# Altium PCB DAP Board V0.3.PcbDoc
Units mil, origin at the board's own origin, x right, y up, seen from the top; angles counter-clockwise.
Board outline 770 x 680 mil, 2 copper layers (Top Layer, Bottom Layer); 6 components, 14 nets, 62 pads, 78 vias.
Unrouted connection lines stored in the file: 8.
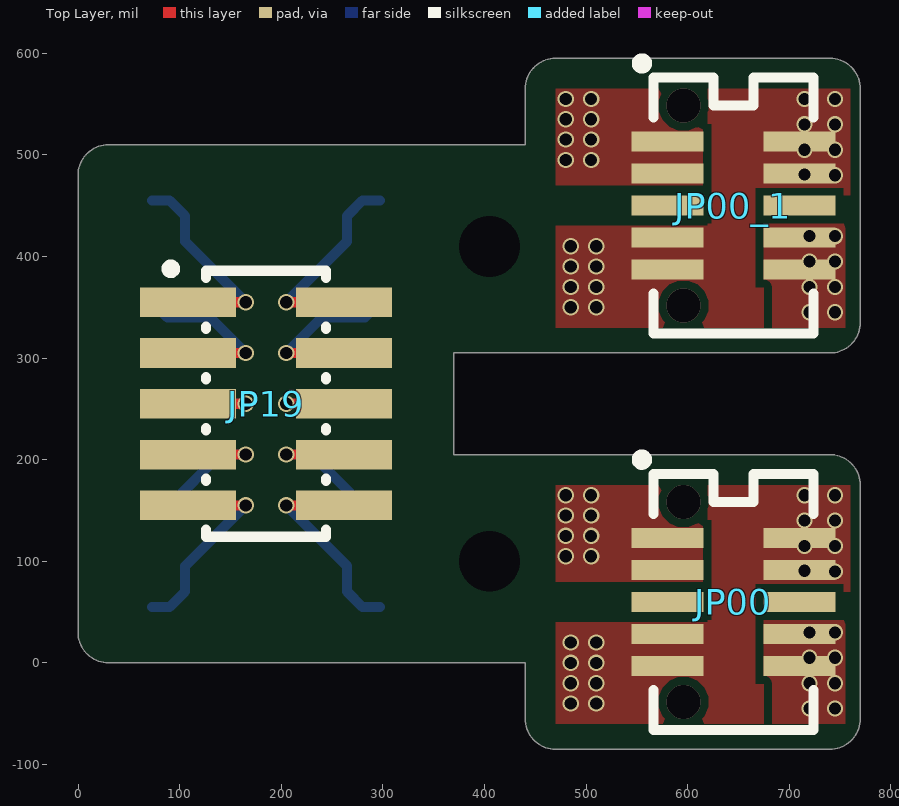
[diagram p0: Top Layer view]
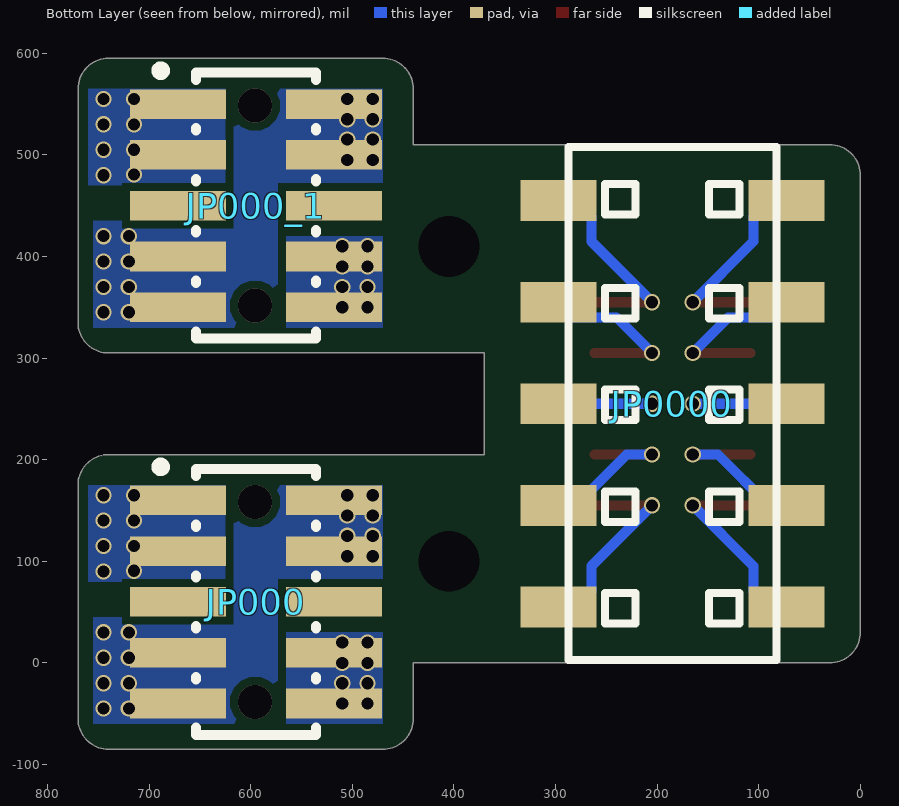
[diagram p1: Bottom Layer view, seen from below]

## Layer stack, top to bottom
Top Solder: solder mask 0.4, Solder Resist, Dk 3.5
Top Layer: signal copper 1.4
Dielectric 1: dielectric 12.6, FR-4, Dk 4.8
Bottom Layer: signal copper 1.4
Bottom Solder: solder mask 0.4, Solder Resist, Dk 3.5

## Board outline
30,0 cw(c30,30) 0,30 0,480 cw(c30,480) 30,510 440,510 440,565 cw(c470,565) 470,595 740,595 cw(c740,565) 770,565 770,335 cw(c740,335) 740,305 370,305 370,205 740,205 cw(c740,175) 770,175 770,-55 cw(c740,-55) 740,-85 470,-85 cw(c470,-55) 440,-55 440,0

## Design rules (kind name [scope] priority, off if disabled: settings)
Clearance [All] p1: gap=8 ignorepadtopadclearanceinfootprint=FALSE except(0: Arc-Hole Track-Hole SMDPad-Hole THPad-Hole Via-Hole Fill-Hole Poly-Hole Region-Hole Text-Hole)
PolygonConnect [All] p1: connectstyle=Relief reliefconductorwidth=10 reliefentries=4 polygonreliefangle="90 Angle" airgapwidth=10
RoutingVias [All] p1: holewidth=28 width=50 viastyle="Through Hole" minholewidth=28 minwidth=50 maxholewidth=28 maxwidth=50
SolderMaskExpansion [All] p1: expansion=4 istentingtop=FALSE
Width [All] p1: maxlimit=8 minlimit=8 preferedwidth=8
30 further rules are at their usual default settings.

## Components (designator, comment, footprint, x,y, rotation, side; value= is the part's Value field where it differs from the comment)
JP00 "Header 5*2" BTB-0.8MM-SMD-BM-2*5PIN 645,60 r0 top
JP000 "Header 5X2" HDR1.27-M-LS-2x5P#1 595,60 r270 bottom
JP0000 "Header 5X2" HDR2.54-M-LS-2x5P 185,255 r270 bottom
JP000_1 "Header 5X2" HDR1.27-M-LS-2x5P#1 595,450 r270 bottom locked (schematic designator JP000)
JP00_1 "Header 5*2" BTB-0.8MM-SMD-BM-2*5PIN 645,450 r0 top (schematic designator JP00)
JP19 "Header 5X2" HDR1.27-M-LS-2x5P#2 185,255 r270 top

## Footprints (in the part's own frame and the unit in brackets; to place one, negate y for a bottom-side part, rotate by r counter-clockwise, add the part's x,y. Pads: shape width x height; smd on the part's side, far side on the other; paste and mask are expansions set on the pad)
BTB-0.8MM-SMD-BM-2*5PIN [mm] "0.8侧插板对板公座，10PIN"
  rect 1.8x0.5 smd: 1(-1.65,1.6) 2(1.65,1.6) 3(-1.65,0.8) 4(1.65,0.8) 5(-1.65,0) 6(1.65,0) 7(-1.65,-0.8) 8(1.65,-0.8) 9(-1.65,-1.6) 10(1.65,-1.6)
  silkscreen extent -2.41,-3.2 2,3.68, body extent -2.16,-2.88 2.05,2.88, height 3.61
HDR1.27-M-LS-2x5P#1 [mm] "脚距：1.27mm，贴片双排母"
  rect 0.74x2.4 smd: 1(-2.54,-1.95) 3(-1.27,-1.95) 5(0,-1.95) 6(0,1.95) 7(1.27,-1.95) 9(2.54,-1.95)
  rect 0.74x2.4 smd mask+0.102: 2(-2.54,1.95) 4(-1.27,1.95) 8(1.27,1.95) 10(2.54,1.95)
  silkscreen extent -3.48,-2.49 3.33,1.5, body extent -3.18,-2.75 3.18,2.75, height 5.5
HDR1.27-M-LS-2x5P#2 [mm] "脚距：1.27mm，贴片双排母"
  rect 0.74x2.4 smd: 1(-2.54,-1.95) 2(-2.54,1.95) 3(-1.27,-1.95) 4(-1.27,1.95) 5(0,-1.95) 6(0,1.95) 7(1.27,-1.95) 8(1.27,1.95) 9(2.54,-1.95) 10(2.54,1.95)
  silkscreen extent -3.48,-2.48 3.33,1.5, body extent -3.18,-2.75 3.18,2.75, height 5.5
HDR2.54-M-LS-2x5P [mm] "脚距：2.54mm，贴片双排母"
  rect 1.02x1.9 smd: 1(-5.08,2.85) 2(-5.08,-2.85) 3(-2.54,2.85) 4(-2.54,-2.85) 5(0,2.85) 6(0,-2.85) 7(2.54,2.85) 8(2.54,-2.85) 9(5.08,2.85) 10(5.08,-2.85)
  silkscreen extent -6.42,-2.6 6.41,2.6, body extent -6.38,-3.2 6.38,3.2, height 5.15

## Part data
JP00 JP00_1: "BTB Connector"
JP000 JP0000 JP000_1 JP19: "5*2P接插件", BOM名称=5*2P接插件, 学习资源=https://shop463601444.taobao.com, 版权归属="封装库来自淘宝 ID：黄晶宝石"

## Free pads (board coordinates)
  round 50 hole 60 unplated: 2(405,410) 2(405,100)

## Via types
v1: diameter 16, hole 12, Top Layer to Bottom Layer, tented both sides, 74 vias
v2: diameter 33.46, hole 33.46, Top Layer to Bottom Layer, 4 vias

## Nets (pads, with @x,y where several pads share a name; then routed paths per layer and width w, separated by ;. In a path a pad name is that pad's centre, name@x,y a point inside that pad or via, vN(x,y) a via of type N, cw(c..) or ccw(c..) an arc to the next point about the centre after c; other vN are vias at no path point)
GND: JP000.1 JP00.2 JP000.3 JP00.4 JP00.7 JP000.8 JP00.9 JP000.10 JP000_1.1 JP00_1.2 JP000_1.3 JP00_1.4 JP00_1.7 JP000_1.8 JP00_1.9 JP000_1.10
  other v1: 485,-40 510,-40 485,-20 510,-20 485,0 510,0 485,20 510,20 745,90 715,90.57 715,115 745,115 715,140 745,140 715,165 745,165 485,350 510,350 485,370 510,370 485,390 510,390 485,410 510,410 745,480 715,480.57 715,505 745,505 715,530 745,530 715,555 745,555
NetJP0000_1: JP0000.1 JP19.1 | length 205.1
  Top Layer w10: JP19.1 v1(165,355)
  Bottom Layer w10: JP0000.1 90.12,455 105.2,439.92 105.2,414.8 v1(165,355)
NetJP0000_2: JP0000.2 JP19.2 | length 205.1
  Top Layer w10: v1(205,355) JP19.2
  Bottom Layer w10: v1(205,355) 264.8,414.8 264.8,439.92 279.88,455 JP0000.2
NetJP0000_3: JP0000.3 JP19.3 | length 169.7
  Top Layer w10: JP19.3 v1(165,305)
  Bottom Layer w10: JP0000.3 87.87,339.92 130.08,339.92 v1(165,305)
NetJP0000_4: JP0000.4 JP19.4 | length 169.7
  Top Layer w10: v1(205,305) JP19.4
  Bottom Layer w10: v1(205,305) 239.92,339.92 282.13,339.92 JP0000.4
NetJP00_5: JP00.5 JP000.6 JP00_1.5 JP000_1.6
NetJP000_5: JP000.5 JP00.6 JP000_1.5 JP00_1.6
NetJP0000_5: JP0000.5 JP19.5 | length 149
  Top Layer w10: JP19.5 v1(165,255)
  Bottom Layer w10: JP0000.5 v1(165,255)
NetJP0000_6: JP0000.6 JP19.6 | length 149
  Top Layer w10: v1(205,255) JP19.6
  Bottom Layer w10: v1(205,255) JP0000.6
NetJP0000_7: JP0000.7 JP19.7 | length 169.7
  Top Layer w10: JP19.7 v1(165,205)
  Bottom Layer w10: JP0000.7 90.12,155 140.12,205 v1(165,205)
NetJP0000_8: JP0000.8 JP19.8 | length 169.8
  Top Layer w10: v1(205,205) JP19.8
  Bottom Layer w10: v1(205,205) 230,205 264.8,170.2 264.8,170.08 279.88,155 JP0000.8
NetJP0000_9: JP0000.9 JP19.9 | length 205.1
  Top Layer w10: JP19.9 v1(165,155)
  Bottom Layer w10: JP0000.9 90.12,55 105.2,70.08 105.2,95.2 v1(165,155)
NetJP0000_10: JP0000.10 JP19.10 | length 205.1
  Top Layer w10: v1(205,155) JP19.10
  Bottom Layer w10: v1(205,155) 264.8,95.2 264.8,70.08 279.88,55 JP0000.10
VBAT: JP00.1 JP000.2 JP00.3 JP000.4 JP000.7 JP00.8 JP000.9 JP00.10 JP00_1.1 JP000_1.2 JP00_1.3 JP000_1.4 JP000_1.7 JP00_1.8 JP000_1.9 JP00_1.10
  other v1: 720,-45 745,-45 720,-20 745,-20 720,5 745,5 720,30 745,30 480,105 505,105 480,125 505,125 480,145 505,145 480,165 505,165 720,345 745,345 720,370 745,370 720,395 745,395 720,420 745,420 480,495 505,495 480,515 505,515 480,535 505,535 480,555 505,555
copper on no net:
  other v2: 595.79,-38.43 595.79,158.43 595.79,351.57 595.79,548.43

## Polygon pours and split planes (outlines as drawn)
GND on Bottom Layer "GND_L02_P009" (solid, pour order 9): 625,565 625,470 760,470 760,565
GND on Bottom Layer "GND_L02_P008" (solid, pour order 8): 470,420 470,330 565,330 565,420
VBAT on Bottom Layer "VBAT_L02_P007" (solid, pour order 7): 470,565 470,470 565,470 565,330 755,330 755,435 625,435 625,565
GND on Bottom Layer "GND_L02_P002" (solid, pour order 2): 625,175 625,80 760,80 760,175
GND on Bottom Layer "GND_L02_P001" (solid, pour order 1): 470,30 470,-60 565,-60 565,30
VBAT on Bottom Layer "VBAT_L02_P000" (solid, pour order 0): 470,175 470,80 565,80 565,-60 755,-60 755,45 625,45 625,175
VBAT on Top Layer "VBAT_L01_P012" (solid, pour order 12): 615,470 470,470 470,565 615,565
VBAT on Top Layer "VBAT_L01_P011" (solid, pour order 11): 675,435 675,330 755,330 755,435
GND on Top Layer "GND_L01_P010" (solid, pour order 10): 470,330 675,330 675,460 760,460 760,565 620,565 620,430 470,430
VBAT on Top Layer "VBAT_L01_P006" (solid, pour order 6): 615,80 470,80 470,175 615,175
VBAT on Top Layer "VBAT_L01_P005" (solid, pour order 5): 675,45 675,-60 755,-60 755,45
GND on Top Layer "GND_L01_P004" (solid, pour order 4): 470,-60 675,-60 675,70 760,70 760,175 620,175 620,40 470,40

## Silkscreen, mask and mechanical layers (free items; w line width, h text height)
Mechanical 1:
  lines w10: 0,30 ccw(c30,30) 30,0 370,0 440,0 440,-55 ccw(c470,-55) 470,-85 740,-85 ccw(c740,-55) 770,-55 770,175 ccw(c740,175) 740,205 370,205 370,305 740,305 ccw(c740,335) 770,335 770,565 ccw(c740,565) 740,595 470,595 ccw(c470,565) 440,565 440,510 370,510 30,510 ccw(c30,480) 0,480 0,30